# Altium PCB BMS Master 3.PcbDoc
Units mil, origin at the board's own origin, x right, y up, seen from the top; angles counter-clockwise.
Board outline 3612.09 x 1633.86 mil, 2 copper layers (Top Layer, Bottom Layer); 76 components, 60 nets, 314 pads, 49 vias.
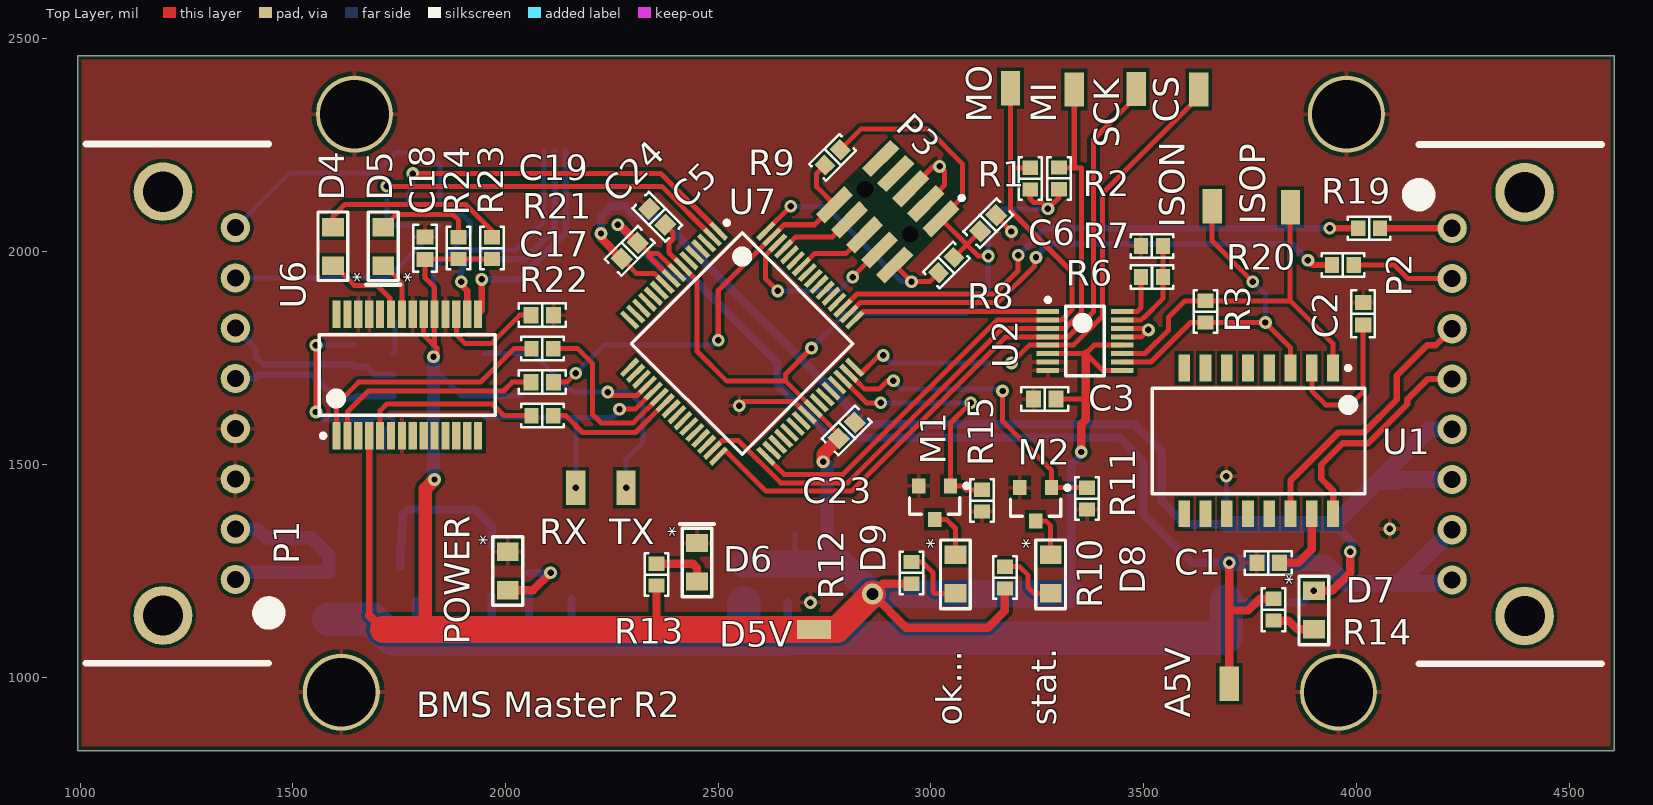
[diagram p0: Top Layer view]
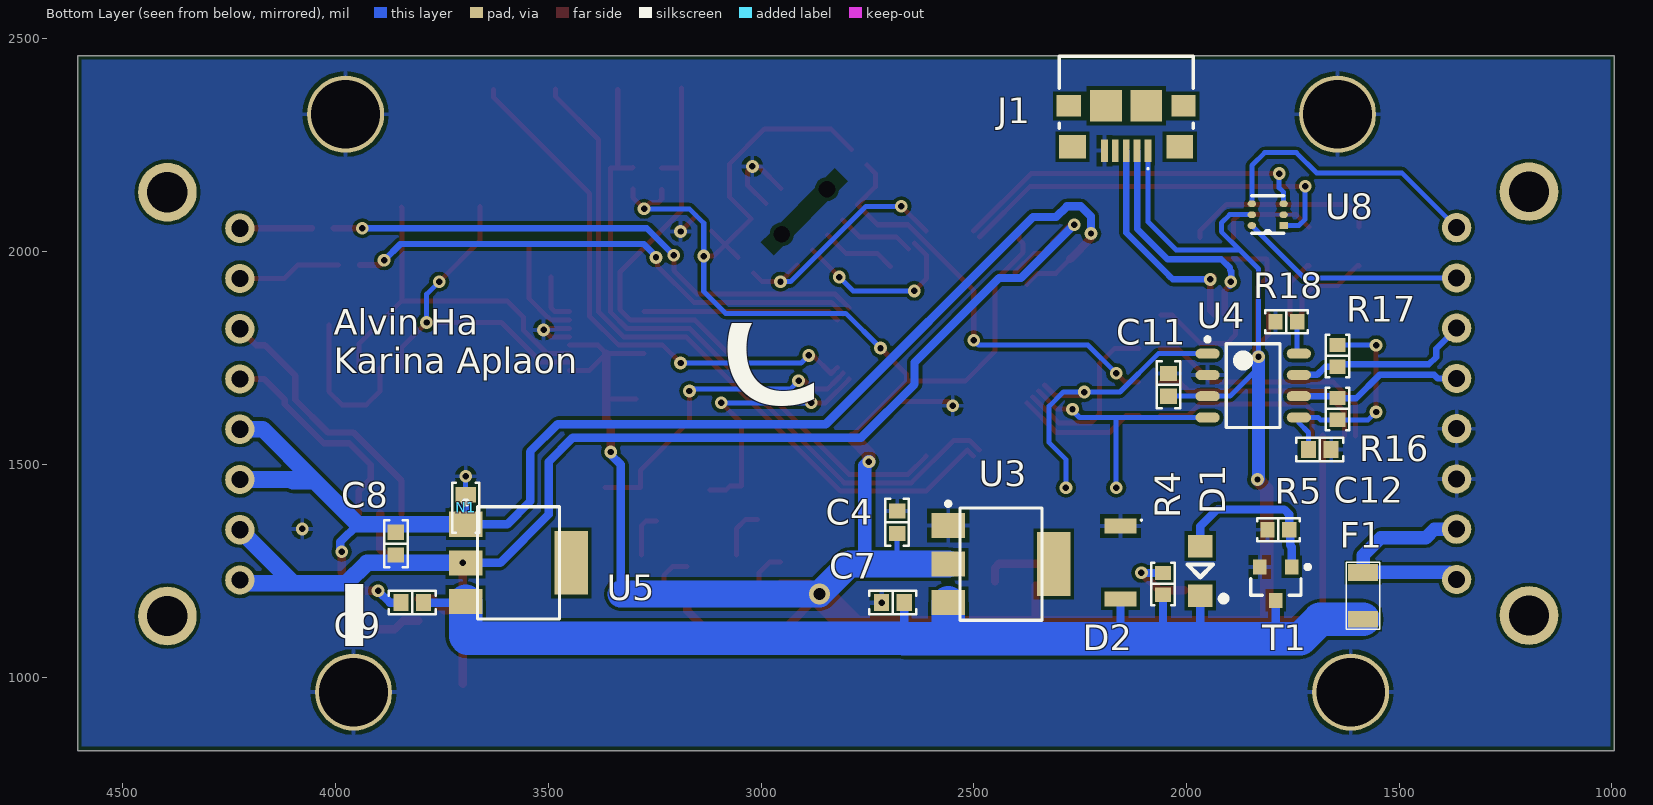
[diagram p1: Bottom Layer view, seen from below]
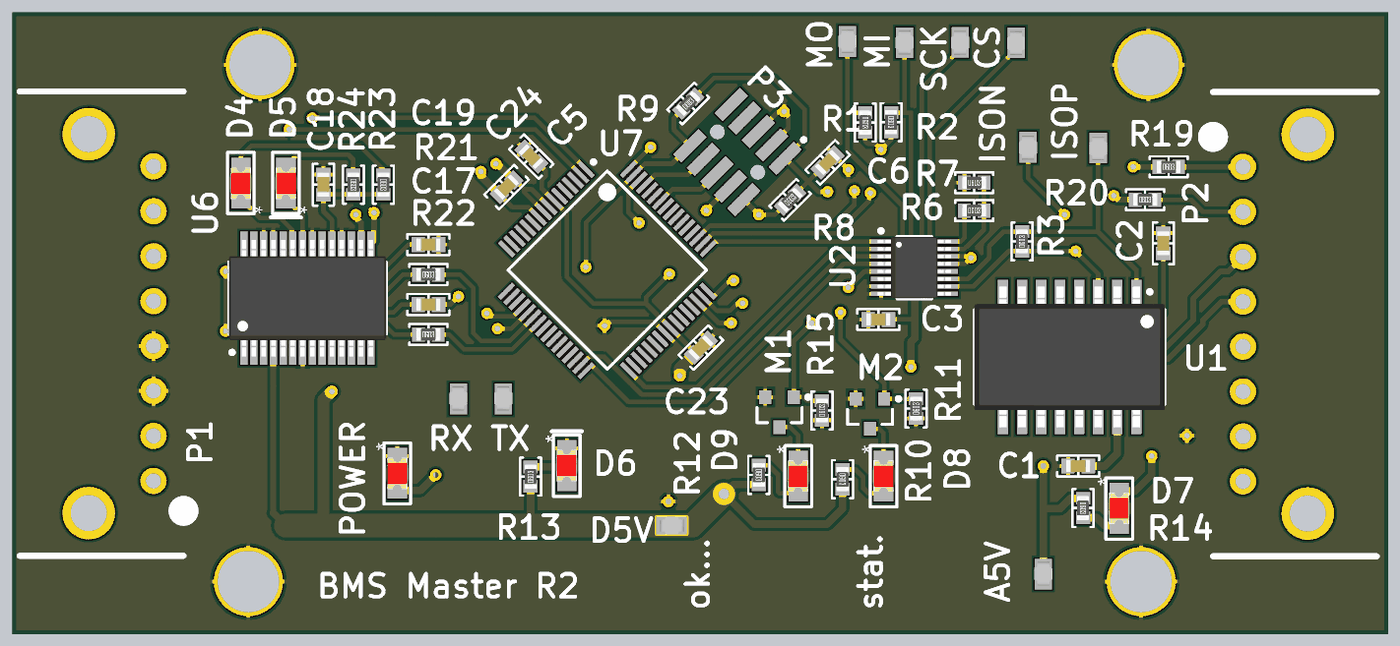
[diagram p2: 3D render of the assembled board from above, using the file's embedded part models]
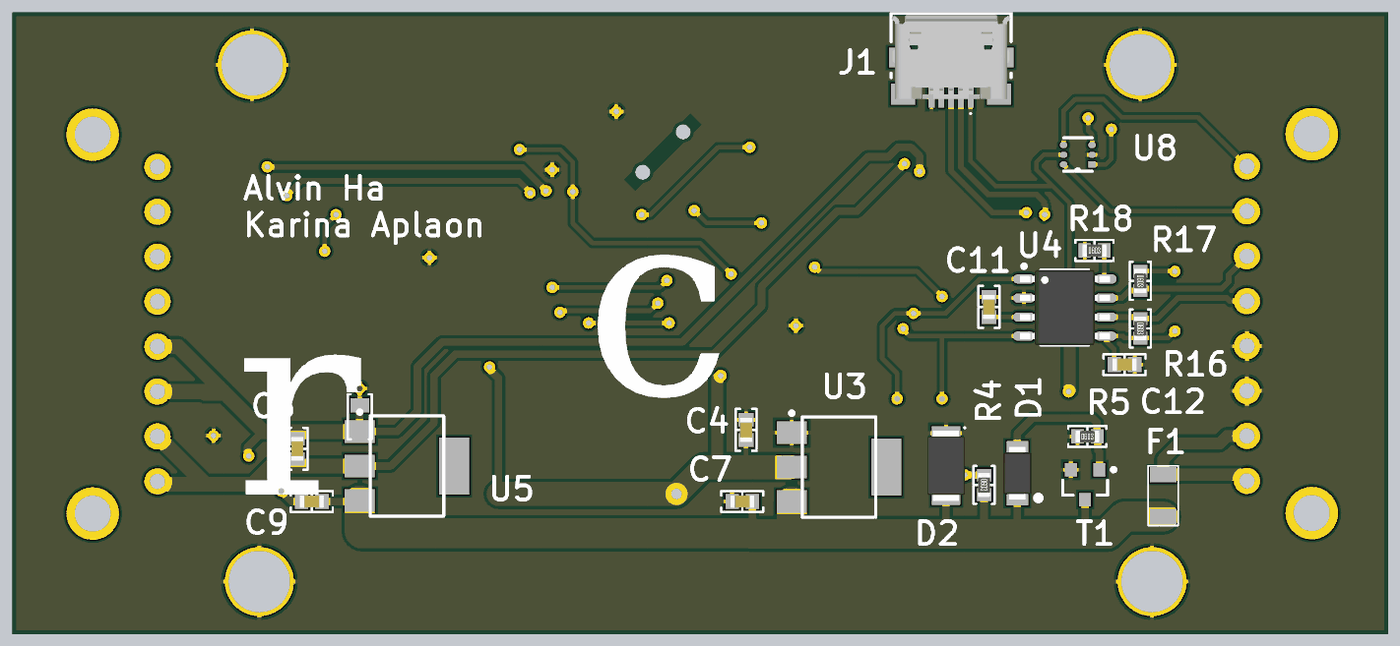
[diagram p3: 3D render of the assembled board from below, using the file's embedded part models]

## Layer stack, top to bottom
Top Solder: solder mask 0.4, Solder Resist, Dk 3.5
Top Layer: signal copper 1.4
Dielectric 1: dielectric 12.6, FR-4, Dk 4.8
Bottom Layer: signal copper 1.4
Bottom Solder: solder mask 0.4, Solder Resist, Dk 3.5

## Board outline
994.21,826.77 4606.3,826.77 4606.3,2460.63 994.21,2460.63

## Design rules (kind name [scope] priority, off if disabled: settings)
BoardOutlineClearance [All] p1: gap=10 ignorepadtopadclearanceinfootprint=FALSE
Clearance [All] p1: gap=8.03 ignorepadtopadclearanceinfootprint=FALSE except(6.3: SMDPad-SMDPad; 7.48: Arc-SMDPad Track-SMDPad; 7.87: Arc-Arc Arc-Track Track-Track)
DiffPairsRouting [All] p1: maxlimit=10 minlimit=10 mostfreqgap=10 toplayer_minwidth=15 toplayer_maxwidth=15 toplayer_prefwidth=15 bottomlayer_minwidth=15 bottomlayer_maxwidth=15 bottomlayer_prefwidth=15 maxuncoupledlength=500
HoleSize [All] p1: absolutevalues=TRUE maxlimit=196.85 minlimit=1 maxpercent=80.000 minpercent=20.000
MatchedLengths "Schematic Matched Net Lengths" [InNet('D_N')] p1: tolerance=10 checknetsindiffpair=FALSE checkdiffpairvsdiffpair=TRUE checkxsignals=TRUE checkothers=TRUE
PolygonConnect [All] p1: connectstyle=Relief reliefconductorwidth=10 reliefentries=4 polygonreliefangle="90 Angle" airgapwidth=10
RoomDefinition U_RVP_OVP_LC [InComponentClass('U_RVP_OVP_LC')] p1: confinementstyle=ConfineIn formatcopy=TRUE lockcomponents=FALSE outline 1675.24,1091.77 2260.24,1091.77 2260.24,1403.74 1675.24,1403.74
RoomDefinition U_CAN_Tranceiver [InComponentClass('U_CAN_Tranceiver')] p2: confinementstyle=ConfineIn formatcopy=TRUE lockcomponents=FALSE outline 1450,1480 2198.19,1480 2198.19,1945 1450,1945
RoutingVias [All] p1: holewidth=15.75 width=27.56 viastyle="Through Hole" minholewidth=15.75 minwidth=27.56 maxholewidth=28 maxwidth=50
SolderMaskExpansion [All] p1: expansion=4
Width [All] p1: maxlimit=393.7 minlimit=10 preferedwidth=11.81 minimp=50.000000 maximp=50.000000 favimp=50.000000
28 further rules are at their usual default settings.

## Classes and differential pairs
component class U_USB: C17 C18 C19 D4 D5 J1 R21 R22 R23 R24 U6
component class U_RVP_OVP_LC: D1 D2 POWER R4 R5 T1
component class U_Power: A5V C4 C7 C8 C9 D5V D6 D7 R13 R14 U3 U5
component class U_MCU_MKE185F512VLH16: C5 C6 C23 C24 CS D8 D9 M1 M2 MI MO P3 R8 R9 R10 R11 R12 R15 RX SCK TX U7
component class U_CAN_Tranceiver: C11 C12 R16 R17 R18 U4
component class "BMS Master": C1 C2 C3 F1 ISON ISOP N1 P1 P2 R1 R2 R3 R6 R7 R19 R20 U1 U2 U8
differential pair ISO: +ISO_P -ISO_N
differential pair D: +D_P -D_N
differential pair CAN: +CAN_P -CAN_N

## Components (designator, comment, footprint, x,y, rotation, side; value= is the part's Value field where it differs from the comment)
A5V "RCU-0C" RCU-0C 3700.79,984.25 r0 top
C1 "Capacitor MLCC 27pf 25V CAP 0603/1608" "CAP 0603/1608" 3792.32,1268.43 r0 top value=27pf
C2 "Capacitor MLCC 27pf 25V CAP 0603/1608" "CAP 0603/1608" 4015.75,1853.82 r270 top value=27pf
C3 "Capacitor MLCC 0.10uf 25V CAP 0603/1608" "CAP 0603/1608" 3267.72,1653.54 r180 top value=0.10uf
C4 "Capacitor MLCC 10uf 25V CAP 0603/1608" "CAP 0603/1608" 2680,1363.43 r270 bottom value=10uf
C5 "Capacitor MLCC 0.10uf 25V CAP 0603/1608" "CAP 0603/1608" 2356.52,2081.78 r315 top value=0.10uf
C6 "Capacitor MLCC 0.10uf 16V CAP 0603/1608" "CAP 0603/1608" 3134.61,2066.61 r225 top value=0.10uf
C7 "Capacitor MLCC 10uf 25V CAP 0603/1608" "CAP 0603/1608" 2690,1175 r180 bottom value=10uf
C8 "Capacitor MLCC 10uf 25V CAP 0603/1608" "CAP 0603/1608" 3858.27,1313.7 r270 bottom value=10uf
C9 "Capacitor MLCC 10uf 25V CAP 0603/1608" "CAP 0603/1608" 3820,1175 r180 bottom value=10uf
C11 "Capacitor MLCC 0.10uf 50V CAP 0603/1608" "CAP 0603/1608" 2042.4,1686.57 r270 bottom value=0.10uf
C12 "Capacitor MLCC 4700pf 50V CAP 0603/1608" "CAP 0603/1608" 1686.57,1535 r0 bottom value=4700pf
C17 "Capacitor MLCC 0.10uf 25V CAP 0603/1608" "CAP 0603/1608" 2086.61,1692.91 r0 top value=0.10uf
C18 "Capacitor MLCC 0.10uf 25V CAP 0603/1608" "CAP 0603/1608" 1811.02,2007.87 r270 top value=0.10uf
C19 "Capacitor MLCC 0.10uf 25V CAP 0603/1608" "CAP 0603/1608" 2086.61,1850.39 r180 top value=0.10uf
C23 "Capacitor MLCC 100pf 25V CAP 0603/1608" "CAP 0603/1608" 2801.94,1579.63 r225 top value=100pf
C24 "Capacitor MLCC 0.10uf 25V CAP 0603/1608" "CAP 0603/1608" 2291.79,2001.6 r45 top value=0.10uf
CS "RCU-0C" RCU-0C 3629.25,2380.91 r180 top
D1 "DDZ9701-7" SOD123F 1967.76,1249.37 r270 bottom value=14Vz
D2 "DIODE" SOD-128 2155.24,1269.37 r270 bottom value=5A
D4 "" 0805_LED 1594.39,2011.89 r270 top value=Green
D5 "" 0805_LED 1712.5,2011.89 r270 top value=Red
D5V "RCU-0C" RCU-0C 2725,1111.97 r270 top
D6 "LED" 0805_LED 2450,1269.72 r90 top value=Red
D7 "LED" 0805_LED 3900,1157.24 r90 top value=Green
D8 "LED" 0805_LED 3281.3,1241.91 r90 top value=Green
D9 "LED" 0805_LED 3057.39,1241.91 r90 top value=Green
F1 "2.2A" "PTC Fuse 1206/3216" 1585,1190.71 r90 bottom
ISON "RCU-0C" RCU-0C 3660.75,2106.3 r180 top value=CONN
ISOP "RCU-0C" RCU-0C 3845,2104.2 r180 top value=CONN
J1 "1981568-1" TECO-1981568-5_V 2141.73,2237.21 r0 bottom value=CONN
M1 "DMG2302UK-7" SOT23-3 3008.39,1410 r270 top value=N_Channel
M2 "DMG2302UK-7" SOT23-3 3245.87,1405.63 r270 top value=N_Channel
MI "RCU-0C" RCU-0C 3336.73,2380.91 r0 top (schematic designator MISO)
MO "RCU-0C" RCU-0C 3186.81,2383.86 r0 top (schematic designator MOSI)
N1 "Net_Tie" Net_Tie 3694.02,1397.82 r90 bottom net-tie
P1 "2-1445054-8" 2-1445054-8 1365.08,1229.33 r270 top
P2 "2-1445054-8" 2-1445054-8 4225,2054.8 r90 top
P3 "5103309-1" HDR2X5_SMT 2898.23,2093.54 r135 top value=CONN
POWER "LED" 0805_LED 2005.16,1249.37 r90 top value=Green (schematic designator POWER1)
R1 "Resistor 10k 0603 1/10W 5%" "RES 0603/1608" 3233.27,2171.26 r270 top value=10k
R2 "Resistor 10k 0603 1/10W 5%" "RES 0603/1608" 3301.3,2172.17 r270 top value=10k
R3 "Resistor 120 0603 1/10W 5%" "RES 0603/1608" 3645,1858.74 r90 top value=120
R4 "Resistor 470 0603 1/10W 5%" "RES 0603/1608" 2055.24,1218.78 r270 bottom value=470
R5 "Resistor 47k 0603 1/10W 5%" "RES 0603/1608" 1784.09,1346.14 r180 bottom value=47k
R6 "Resistor 1.5k 0603 1/10W 5%" "RES 0603/1608" 3519.43,1940 r0 top value=1.5k
R7 "Resistor 1.0k 0603 1/10W 5%" "RES 0603/1608" 3519.42,2013.15 r0 top value=1.0k
R8 "Resistor 10k 0603 1/10W 1%" "RES 0603/1608" 3036.18,1968.19 r45 top value=10k
R9 "Resistor 10k 0603 1/10W 5%" "RES 0603/1608" 2768.74,2221.26 r45 top value=10k
R10 "Resistor 470 0603 1/10W 5%" "RES 0603/1608" 3173.74,1233.74 r270 top value=470
R11 "Resistor 10k 0603 1/10W 1%" "RES 0603/1608" 3366.77,1419.41 r90 top value=10k
R12 "Resistor 470 0603 1/10W 5%" "RES 0603/1608" 2954.07,1245 r270 top value=470
R13 "Resistor 200 0603 1/10W 5%" "RES 0603/1608" 2355,1240.59 r90 top value=200
R14 "Resistor 200 0603 1/10W 5%" "RES 0603/1608" 3805,1158.15 r270 top value=200
R15 "Resistor 10k 0603 1/10W 1%" "RES 0603/1608" 3120,1414.41 r90 top value=10k
R16 "Resistor 62 0603 1/10W 5%" "RES 0603/1608" 1645,1630 r270 bottom value=62
R17 "Resistor 62 0603 1/10W 5%" "RES 0603/1608" 1645,1755 r270 bottom value=62
R18 "Resistor 100 0603 1/10W 10%" "RES 0603/1608" 1765.39,1835 r180 bottom value=100
R19 "Resistor 470 0603 1/10W 5%" "RES 0603/1608" 4029.84,2054.8 r0 top value=470
R20 "Resistor 470 0603 1/10W 5%" "RES 0603/1608" 3968.01,1968.5 r0 top value=470
R21 "Resistor 1.0k 0603 1/10W 5%" "RES 0603/1608" 2086.61,1771.65 r0 top value=1.0k
R22 "Resistor 1.0k 0603 1/10W 5%" "RES 0603/1608" 2086.61,1614.17 r0 top value=1.0k
R23 "Resistor 1.0k 0603 1/10W 5%" "RES 0603/1608" 1968.5,2007.87 r270 top value=1.0k
R24 "Resistor 1.0k 0603 1/10W 5%" "RES 0603/1608" 1889.76,2007.87 r270 top value=1.0k
RX "RCU-0C" RCU-0C 2165.35,1445 r0 top
SCK "RCU-0C" RCU-0C 3482.6,2381.89 r180 top
T1 "DMG2302UK-7" SOT23-3 1790,1219.37 r270 bottom value=N_Channel
TX "RCU-0C" RCU-0C 2283.46,1445 r0 top
U1 "HX1188NLT" HX1188NLT 3770,1555 r270 top
U2 "LTC6820" MSOP-16 3362.32,1789.84 r0 top
U3 "NCP1117ST50T3G" SOT-223-3 2435.98,1265.55 r180 bottom value="5V 1.0A"
U4 "MCP2561 CAN Transceiver" SOIC-8 1843.19,1685 r180 bottom value=CAN/UART
U5 "NCP1117ST50T3G" SOT-223-3 3570,1268.43 r180 bottom value="5V 1.0A"
U6 "FT232RL" SSOP-28 1769.24,1709.73 r90 top
U7 "" TQFP64 2556.26,1783.62 r315 top
U8 "comment" 6-TSSOP 1771.65,2061.02 r0 bottom value=None

## Footprints (in the part's own frame and the unit in brackets; to place one, negate y for a bottom-side part, rotate by r counter-clockwise, add the part's x,y. Pads: shape width x height; smd on the part's side, far side on the other; paste and mask are expansions set on the pad)
2-1445054-8 [mm] "8p through hole connector"
  round 1.75 hole 1.02: 1(0,0) 2(-3,0) 3(-6,0) 4(-9,0) 5(-12,0) 6(-15,0) 7(-18,0) 8(-21,0)
  round 3.5 hole 2.41: 9(-23.15,-4.32) 10(2.15,-4.32)
  silkscreen extent -26,-8.92 5,2.5, body extent -26,-8.92 5,0, height 4.37
6-TSSOP [mm]
  rect 0.5x0.4 smd: 1(0,0)
  oval 0.5x0.4 smd: 2(0,-0.65) 3(0,-1.3) 4(1.9,-1.3) 5(1.9,-0.65) 6(1.9,0)
  silkscreen extent 0,-1.78 1.9,0.45
0805_LED [mm]
  rect 1.1x1.3 smd: 1(-1.15,0) 2(1.15,0)
  silkscreen extent -2.06,-0.89 2.03,0.89, body extent -1.05,-0.67 1.05,0.68, height 0.9
"CAP 0603/1608" [mm] "Chip Capacitor, 2-Leads, Body 1.60x0.80mm, IPC Medium Density"
  rect 0.9x1 smd: 1(-0.675,0) 2(0.675,0)
  silkscreen extent -1.4,-0.7 1.4,0.7, body extent -0.8,-0.41 0.8,0.41, height 0.82
HDR2X5_SMT [mm] "Header, 10-Leads, Body 3.43x6.35mm, Pitch 1.27mm"
  rect 0.76x2.4 smd: 1(-2.54,-1.95) 2(-2.54,1.95) 3(-1.27,-1.95) 4(-1.27,1.95) 5(0,-1.95) 6(0,1.95) 7(1.27,-1.95) 8(1.27,1.95) 9(2.54,-1.95) 10(2.54,1.95)
  round 0 hole 1 unplated: MH1(-1.905,0) MH2(1.905,0)
  silkscreen extent -2.66,-3.82 -2.42,-3.58, body extent -3.18,-1.72 3.18,1.72, height 4.55
HX1188NLT [mm] "XFRMR MAGNETIC 1PORT 1:1 10/100"
  rect 1.6x0.7 smd: 1(-4.35,4.445) 2(-4.35,3.175) 3(-4.35,1.905) 4(-4.35,0.635) 5(-4.35,-0.635) 6(-4.35,-1.905) 7(-4.35,-3.175) 8(-4.35,-4.445) 9(4.35,-4.445) 10(4.35,-3.175) 11(4.35,-1.905) 12(4.35,-0.635) 13(4.35,0.635) 14(4.35,1.905) 15(4.35,3.175) 16(4.35,4.445)
  silkscreen extent -4.47,-6.35 3.15,6.35, body extent -4.7,-6.35 4.7,6.35, height 5.97
MSOP-16 [mm]
  rect 1.35x0.3 smd: 1(-2.225,1.75) 2(-2.225,1.25) 3(-2.225,0.75) 4(-2.225,0.25) 5(-2.225,-0.25) 6(-2.225,-0.75) 7(-2.225,-1.25) 8(-2.225,-1.75) 9(2.225,-1.75) 10(2.225,-1.25) 11(2.225,-0.75) 12(2.225,-0.25) 13(2.225,0.25) 14(2.225,0.75) 15(2.225,1.25) 16(2.225,1.75)
  silkscreen extent -2.35,-2.07 1.15,2.57, body extent -2.45,-2.05 2.45,2.05, height 1.1
Net_Tie [mm] "Chip Resistor, 2-Leads, Body 2.00x1.25mm, IPC High Density"
  rect 0.95x1.25 smd: 1(-0.775,0) 2(0.775,0)
  Top Layer lines w0.5: -0.381,0 0.381,0
  silkscreen extent -1.5,-0.8 1.5,0.8
"PTC Fuse 1206/3216" [mm]
  rect 1x1.8 smd: 1(-1.4,0) 2(1.4,0)
  silkscreen extent -2,-1 2,1, body extent -1.75,-1 1.75,1, height 1
RCU-0C [mm]
  rect 1.15x2.05 smd: 1(0,0)
  body extent -0.6,-0.78 0.6,0.82, height 1.16
"RES 0603/1608" [mm] "Chip Resistor, 2-Leads, Body 1.60x0.80mm, IPC Medium Density"
  rect 0.85x0.95 smd: 1(-0.65,0) 2(0.65,0)
  silkscreen extent -1.27,-0.7 1.27,0.7, body extent -0.8,-0.4 0.8,0.4, height 0.45
SOD123F [mm] "SODFL, 2-Leads, Body 1.80x3.50mm, IPC Low Density"
  rect 1.35x1.45 smd: 1(-1.475,0) 2(1.475,0)
  silkscreen extent -0.38,-0.76 1.75,1.5, body extent -1.75,-0.95 1.75,0.95, height 1.15
SOD-128 [mm] "SOD-128, 2-Leads, Body 2.40x4.70mm, IPC Medium Density"
  rect 0.9x1.9 smd: 1(-2.175,0) 2(2.175,0)
  silkscreen extent -2.57,1.2 -2.48,1.3, body extent -2.35,-1.25 2.35,1.25, height 0.85
SOIC-8 [mm] "SOIC, 8-Leads, Body 4.90x3.90mm, Pitch 1.27mm, IPC Medium Density"
  oval 1.45x0.6 smd: 1(-2.725,1.905) 2(-2.725,0.635) 3(-2.725,-0.635) 4(-2.725,-1.905) 5(2.725,-1.905) 6(2.725,-0.635) 7(2.725,0.635) 8(2.725,1.905)
  silkscreen extent -2.85,-2.5 1.6,2.88, body extent -3,-2.5 3,2.5, height 1.75
SOT23-3 [mm] "SOT23, 3-Leads, Body 2.92x2.37mm, Pitch 0.95mm, IPC Medium Density, NUP2105L"
  rect 0.9x0.8 smd: 1(-1,0.95) 2(-1,-0.95) 3(1,0)
  silkscreen extent -1.12,-1.5 0.7,2.03, body extent -0.7,-1.52 0.7,1.52, height 1.11
SOT-223-3 [mm] "SOT223127P600-8N, NCP1117STAT3G, MMBT4403-7-F"
  rect 2x1.5 smd: 1(-3.15,2.3) 2(-3.15,0) 3(-3.15,-2.3)
  rect 2x3.8 smd: THM(3.15,0)
  silkscreen extent -3.27,-3.35 2.45,3.72, body extent -1.85,-3.35 1.85,3.35, height 1.8
SSOP-28 [mm] "hi"
  rect 1.65x0.49 smd: 1(-3.625,4.225) 2(-3.625,3.575) 3(-3.625,2.925) 4(-3.625,2.275) 5(-3.625,1.625) 6(-3.625,0.975) 7(-3.625,0.325) 8(-3.625,-0.325) 9(-3.625,-0.975) 10(-3.625,-1.625) 11(-3.625,-2.275) 12(-3.625,-2.925) 13(-3.625,-3.575) 14(-3.625,-4.225) 15(3.625,-4.225) 16(3.625,-3.575) 17(3.625,-2.925) 18(3.625,-2.275) 19(3.625,-1.625) 20(3.625,-0.975) 21(3.625,-0.325) 22(3.625,0.325) 23(3.625,0.975) 24(3.625,1.625) 25(3.625,2.275) 26(3.625,2.925) 27(3.625,3.575) 28(3.625,4.225)
  silkscreen extent -3.75,-5.25 2.4,5.25, body extent -3.9,-5.25 3.9,5.25, height 2
TECO-1981568-5_V [mm] "SMD, 5-Leads, Body 8x5.9mm, Pitch 0.65mm"
  rect 0.4x1.35 smd: 1(-1.3,0) 2(-0.65,0) 3(0,0) 4(0.65,0) 5(1.3,0)
  rect 1.6x1.4 smd: 6(-3.2,-0.225) 7(3.2,-0.225)
  rect 1.45x1.3 smd: 8(-3.425,-2.675) 9(3.425,-2.675)
  rect 1.9x1.9 smd: 10(-1.2,-2.675) 11(1.2,-2.675)
  silkscreen extent -4,-5.62 4,1.12, body extent -4,-5.5 4,0.1, height 2.79
TQFP64 [mm] "TSQFP, 64-Leads, Body 10.00x10.00mm, Pitch 0.50mm, IPC Medium Density, MKE18F512VLH16"
  rect 1.35x0.3 smd: 1(-5.75,3.75) 2(-5.75,3.25) 3(-5.75,2.75) 4(-5.75,2.25) 5(-5.75,1.75) 6(-5.75,1.25) 7(-5.75,0.75) 8(-5.75,0.25) 9(-5.75,-0.25) 10(-5.75,-0.75) 11(-5.75,-1.25) 12(-5.75,-1.75) 13(-5.75,-2.25) 14(-5.75,-2.75) 15(-5.75,-3.25) 16(-5.75,-3.75) 33(5.75,-3.75) 34(5.75,-3.25) 35(5.75,-2.75) 36(5.75,-2.25) 37(5.75,-1.75) 38(5.75,-1.25) 39(5.75,-0.75) 40(5.75,-0.25) 41(5.75,0.25) 42(5.75,0.75) 43(5.75,1.25) 44(5.75,1.75) 45(5.75,2.25) 46(5.75,2.75) 47(5.75,3.25) 48(5.75,3.75)
  rect 0.3x1.35 smd: 17(-3.75,-5.75) 18(-3.25,-5.75) 19(-2.75,-5.75) 20(-2.25,-5.75) 21(-1.75,-5.75) 22(-1.25,-5.75) 23(-0.75,-5.75) 24(-0.25,-5.75) 25(0.25,-5.75) 26(0.75,-5.75) 27(1.25,-5.75) 28(1.75,-5.75) 29(2.25,-5.75) 30(2.75,-5.75) 31(3.25,-5.75) 32(3.75,-5.75) 49(3.75,5.75) 50(3.25,5.75) 51(2.75,5.75) 52(2.25,5.75) 53(1.75,5.75) 54(1.25,5.75) 55(0.75,5.75) 56(0.25,5.75) 57(-0.25,5.75) 58(-0.75,5.75) 59(-1.25,5.75) 60(-1.75,5.75) 61(-2.25,5.75) 62(-2.75,5.75) 63(-3.25,5.75) 64(-3.75,5.75)
  silkscreen extent -5.87,-4.68 4.68,4.68, body extent -5,-5 5,5, height 1.6

## Part data
A5V CS D5V MI MO RX SCK TX: library part 5, Manufacturer_id=1, Package=0603, ComponentLink1Description=Datasheet, ComponentLink1URL=https://www.te.com/commerce/DocumentDelivery/DDEController?Action=srchrtrv&DocNm=1773266&DocType=DS&DocLang=English, Drawer_id=1, idTable=5, Link=https://www.digikey.com/product-detail/en/te-connectivity-amp-connectors/RCU-0C/A106145CT-ND/3477802, MfrPartNo=RCU-0C, Name=RCU-0C_Test_Point
C1 C2: library part 515, Dielectric=Ceramic, Manufacturer_id=1, Package="CAP 0603/1608", Voltage_Rating=25V, Created_By="Nick Mah", Created_Date=10/20/2018, Drawer_id=1, idCapacitor=515, Name="Cap_27pf_25V_CAP 0603/1608"
C3 C5 C17 C18 C19 C24: library part 583, Dielectric=Ceramic, Manufacturer_id=1, Package="CAP 0603/1608", Voltage_Rating=25V, Created_By="Nick Mah", Created_Date=10/20/2018, Drawer_id=1, idCapacitor=583, Name="Cap_0.10uf_25V_CAP 0603/1608"
C4 C7 C8 C9: library part 595, Dielectric=Ceramic, Manufacturer_id=1, Package="CAP 0603/1608", Voltage_Rating=25V, Created_By="Nick Mah", Created_Date=10/20/2018, Drawer_id=1, idCapacitor=595, Name="Cap_10uf_25V_CAP 0603/1608"
C6: library part 223, Dielectric=Ceramic, Manufacturer_id=1, Package="CAP 0603/1608", Voltage_Rating=16V, Created_By="Nick Mah", Created_Date=10/20/2018, Drawer_id=1, idCapacitor=223, Name="Cap_0.10uf_16V_CAP 0603/1608"
C11: library part 943, Dielectric=Ceramic, Manufacturer_id=1, Package="CAP 0603/1608", Voltage_Rating=50V, Created_By="Nick Mah", Created_Date=10/20/2018, Drawer_id=1, idCapacitor=943, Name="Cap_0.10uf_50V_CAP 0603/1608"
C12: library part 929, Dielectric=Ceramic, Manufacturer_id=1, Package="CAP 0603/1608", Voltage_Rating=50V, Created_By="Nick Mah", Created_Date=10/20/2018, Drawer_id=1, idCapacitor=929, Name="Cap_4700pf_50V_CAP 0603/1608"
C23: library part 529, Dielectric=Ceramic, Manufacturer_id=1, Package="CAP 0603/1608", Voltage_Rating=25V, Created_By="Nick Mah", Created_Date=10/20/2018, Drawer_id=1, idCapacitor=529, Name="Cap_100pf_25V_CAP 0603/1608"
D1: library part 10, "Zener Diode 14V 500mW ±5% Surface Mount SOD-123", Manufacturer_id=8, Package=SOD-123, Power=500mW, Supplier1PartNo=DDZ9701-7DICT-ND, ComponentLink1Description=Datasheet, ComponentLink1URL=https://www.diodes.com/assets/Datasheets/ds30410.pdf, Drawer_id=1, idDiode=10, Link=https://www.digikey.com/product-detail/en/diodes-incorporated/DDZ9701-7/DDZ9701-7DICT-ND/3877402, MfrPartNo=DDZ9701-7, Name=DDZ9701, Num_Circuits=1, Supplier1=Digi-Key, Type=Zener
D2: library part 12, "DIODE SCHOTTKY 30V 5A TMINIP2", Manufacturer_id=1, MfrPartNo=DB2431200L, Package=SOD-128, Power=30V, Supplier1PartNo=DB2431200LCT-ND, ComponentLink1Description=Datasheet, ComponentLink1URL=https://industrial.panasonic.com/content/data/SC/ds/ds4/DB2431200L_E.pdf, Drawer_id=1, Ic=5A, idDiode=12, Link=https://www.digikey.com/product-detail/en/panasonic-electronic-components/DB2431200L/DB2431200LCT-ND/3884430, Name=DB2431200L, Num_Circuits=1, Supplier1=Digi-Key, Type=Schottky
D4 D7 D8 D9 POWER: library part 2, Manufacturer_id=1, Package=0805, Brightness=7mcd, Drawer_id=1, Id=20mA, idLED=2, Link=https://www.digikey.com/product-detail/en/visual-communications-company-vcc/CMD17-21VGD-TR8/L62505CT-ND/254936, Name=CMD17_0805_GREEN, Vf=2.1V
D5 D6: library part 1, Package=0805, Drawer_id=1, idLED=1, Manufacturer_id=1, Name=LED_0805_RED, Vf=0.7V
F1: library part 8, "Fuse", Manufacturer_id=1, MfrPartNo=1206L110/12SLYR, Drawer_id=1, I_hold=1.1A, I_max=50A, I_trip=2.2A, idFuse=8, LatestRevisionDate=17-Jul-2002, LatestRevisionNote="Re-released for DXP Platform.", Link=https://www.digikey.com/product-detail/en/littelfuse-inc/1206L110-12SLYR/F5764CT-ND/3593809, Name=Resettable, PackageDescription="Thru-Hole; 2 Leads", PackageReference=PIN-W2/E2.8, Pd_Typ=.8W, Published=8-Jun-2000, Publisher="Altium Limited", V_max=12V
ISON ISOP: library part 14, "Test point", Manufacturer_id=1, Supplier1PartNo=None, ComponentLink1Description=Null, ComponentLink1URL=Null, Created_By=Graydon, Created_Date=11/10/2018, Drawer_id=1, idConn=14, Link=https://www.digikey.com/product-detail/en/te-connectivity-amp-connectors/RCU-0C/A106145CT-ND/3477802, MfrPartNo=RCU-0C, Name=RCU-0C, Num_Contacts=1, Num_Rows=1, Package=RCU-0C, Supplier1=None, Updated_By=Null
J1: library part 5, "USB Micro Type B", Manufacturer_id=1, ComponentLink1Description=Datasheet, Created_By=Aiku, Created_Date=10/20/2018, Drawer_id=1, idConn=5, Link=https://www.mouser.com/ProductDetail/TE-Connectivity-AMP/1981568-1?qs=sGAEpiMZZMulM8LPOQ%252bykzEIUPbUCiSfqsfxH3Oq%252bYo%3d, MfrPartNo=1981568-1, Name="TE USB Micro", Num_Contacts=5, Supplier1=TE
M1 M2 T1: library part 6, "MOSFET N-CHANNEL 30V 5A SOT23", Manufacturer_id=1, Package=SOT-23, Created_By=Angel, Drawer_id=1, Id=2.8A, idFETs=6, Link=https://www.digikey.com/product-detail/en/diodes-incorporated/DMG2302UK-7/DMG2302UK-7DICT-ND/6010163, MfrPartNo=DMG2302UK-7, Name=DMG2302UK-7, Num_Circuits=1, Rds_On=90mOhm, Supplier1=Digi-Key, Vdss=20V, Vgs(Max)=1V, Vgs(typ)=800mV
N1 U7: library part 1, Drawer_id=1, Manufacturer_id=1
  N1: idFuse=3, idShunt=1, Name="Net Tie"
  U7: idMCU=1, Name="MKE18F512VLH16 MCU"
P1 P2: library part 12, "1x8 connector", Manufacturer_id=5, Supplier1PartNo=2-1445054-8-ND, ComponentLink1Description=Datasheet, Created_By=Graydon, Created_Date=11/10/2018, Drawer_id=1, idConn=12, Link=https://www.digikey.com/product-detail/en/te-connectivity-amp-connectors/2-1445054-8/2-1445054-8-ND/1890093, MfrPartNo=2-1445054-8, Name="Micro MATE-N-LOK 1x8", Num_Contacts=8, Num_Rows=1, Supplier1=Digi-Key
P3: library part 4, "2 row connector", Manufacturer_id=1, Voltage_Rating=None, ComponentLink1Description=Datasheet, Created_By=Aiku, Drawer_id=1, idConn=4, Link=https://www.digikey.com/product-detail/en/5103309-1/A33160-ND/1114898?utm_campaign=buynow&WT.z_cid=ref_octopart_dkc_buynow&utm_medium=aggregator&curr=usd&site=us&utm_source=octopart, MfrPartNo=5103309-1, Name=CONN_TE_2X5POS, Num_Contacts=10, Num_Rows=2, Pitch=2.54mm
R1 R2 R9: library part 1393, Manufacturer_id=1, Package=0603, Power=1/10W, Tolerance=5%, ComponentLink1Description=Datasheet, Created_By="Nick Mah", Created_Date=2018-10-20, Drawer_id=1, idResistor=1393, Name=Res_10k_0603_1/10W_5%, Supplier 1=Digi-Key
R3: library part 1347, Manufacturer_id=1, Package=0603, Power=1/10W, Tolerance=5%, ComponentLink1Description=Datasheet, Created_By="Nick Mah", Created_Date=2018-10-20, Drawer_id=1, idResistor=1347, Name=Res_120_0603_1/10W_5%, Supplier 1=Digi-Key
R4 R10 R12 R19 R20: library part 1361, Manufacturer_id=1, Package=0603, Power=1/10W, Tolerance=5%, ComponentLink1Description=Datasheet, Created_By="Nick Mah", Created_Date=2018-10-20, Drawer_id=1, idResistor=1361, Name=Res_470_0603_1/10W_5%, Supplier 1=Digi-Key
R5: library part 1409, Manufacturer_id=1, Package=0603, Power=1/10W, Tolerance=5%, ComponentLink1Description=Datasheet, Created_By="Nick Mah", Created_Date=2018-10-20, Drawer_id=1, idResistor=1409, Name=Res_47k_0603_1/10W_5%, Supplier 1=Digi-Key
R6: library part 1373, Manufacturer_id=1, Package=0603, Power=1/10W, Tolerance=5%, ComponentLink1Description=Datasheet, Created_By="Nick Mah", Created_Date=2018-10-20, Drawer_id=1, idResistor=1373, Name=Res_1.5k_0603_1/10W_5%, Supplier 1=Digi-Key
R7 R21 R22 R23 R24: library part 1369, Manufacturer_id=1, Package=0603, Power=1/10W, Tolerance=5%, ComponentLink1Description=Datasheet, Created_By="Nick Mah", Created_Date=2018-10-20, Drawer_id=1, idResistor=1369, Name=Res_1.0k_0603_1/10W_5%, Supplier 1=Digi-Key
R8 R11 R15: library part 313, Manufacturer_id=1, Package=0603, Power=1/10W, Tolerance=1%, ComponentLink1Description=Datasheet, Created_By="Nick Mah", Created_Date=2018-10-20, Drawer_id=1, idResistor=313, Name=Res_10k_0603_1/10W_1%, Supplier 1=Digi-Key
R13 R14: library part 1352, Manufacturer_id=1, Package=0603, Power=1/10W, Tolerance=5%, ComponentLink1Description=Datasheet, Created_By="Nick Mah", Created_Date=2018-10-20, Drawer_id=1, idResistor=1352, Name=Res_200_0603_1/10W_5%, Supplier 1=Digi-Key
R16 R17: library part 1340, Manufacturer_id=1, Package=0603, Power=1/10W, Tolerance=5%, ComponentLink1Description=Datasheet, Created_By="Nick Mah", Created_Date=2018-10-20, Drawer_id=1, idResistor=1340, Name=Res_62_0603_1/10W_5%, Supplier 1=Digi-Key
R18: library part 2293, Manufacturer_id=1, Package=0603, Power=1/10W, Tolerance=10%, ComponentLink1Description=Datasheet, Created_By="Nick Mah", Created_Date=2018-10-20, Drawer_id=1, idResistor=2293, Name=Res_100_0603_1/10W_10%, Supplier 1=Digi-Key
U1: library part 8, Manufacturer_id=1, Created_By=Angel, Drawer_id=1, idFuse=3, idIC_Interface=8, Link=https://www.digikey.com/product-detail/en/pulse-electronics-network/HX1188NLT/553-1536-1-ND/3151809?utm_adgroup=Transformers&slid=&gclid=CjwKCAiAhp_jBRAxEiwAXbniXRrdDycXKcdMEppGgTacWMJf80VG2GQDdYxlb9yRzxEZsto0mBbjlhoCtm4QAvD_BwE, MfrPartNo=HX1188NLT, Name=HX1188NLT, Num_Circuits=2, Package=HX1188NLT, Type="Magnetic Isolation"
U2: library part 7, "soSPI Isolated / Communications Interface", Manufacturer_id=1, Package=MSOP-16, Created_By=Angel, Drawer_id=1, idFuse=3, idIC_Interface=7, Link=https://www.mouser.com/ProductDetail/Analog-Devices/LTC6820IMSPBF?qs=sGAEpiMZZMvi6wO7nhr1LyTLeBC7dAWQpR44bZH0zYY%3d, MfrPartNo=LTC6820, Name=LTC6820, Num_Circuits=1, Protocol=isoSPI, Type=bidirectional, Vin(Max)=5.5V, Vin(Min)=2.7V
U3 U5: library part 16, "Linear Voltage Regulator IC Positive Fixed 1 Output 5V 1A SOT-223", Current_Rating=1A, Dropout_Voltage="1.2V @ 800mA", Manufacturer_id=1, Package=SOT-223-3, ComponentLink1Description=Datasheet, ComponentLink1URL=https://www.onsemi.com/pub/Collateral/NCP1117-D.PDF, Created_By="Angel Delgado", Drawer_id=1, idPMIC_Lin=16, Link=https://www.digikey.com/product-detail/en/on-semiconductor/NCP1117ST50T3G/NCP1117ST50T3GOSCT-ND/1967217, MfrPartNo=NCP1117ST50T3G, Name="5V 1A LDO", Num_Outputs=1, Output_Config="5V Fixed", Vin(Max)=20V, Vout(Max)=5.05, Vout(Min)=4.95, Vout_Type=Fixed
U4: library part 5, Manufacturer_id=1, MfrPartNo=MCP2561, Package=SOIC-8, Created_By="Angel Delgado", Data_Rate=1Mbps, Drawer_id=1, idIC_Interface=5, Link=https://www.digikey.com/product-detail/en/microchip-technology/MCP2561T-E-SN/MCP2561T-E-SNCT-ND/5148846, Name="CAN Transceiver", Num_Circuits=1, Protocol=CAN, Type=Transceiver, Vin(Max)=5.5V, Vin(Min)=4.5V
U6: library part 3, Manufacturer_id=1, Created_By=Kyle, Drawer_id=1, idIC_Interface=3, Link=https://www.digikey.com/product-detail/en/ftdi-future-technology-devices-international-ltd/FT232RL-REEL/768-1007-1-ND/1836402, MfrPartNo=FT232RL, Name="USB FTDI", Protocol=UART, Vin(Max)=5.25, Vin(Min)=3.3
U8: library part 10, "Buffer dual high speed", Manufacturer_id=1, MfrPartNo=NC7WZ07P6X, Package=6-TSSOP, Supplier1PartNo=NC7WZ07P6XCT-ND, ComponentLink1Description=Digikey, ComponentLink1URL=https://www.digikey.com/product-detail/en/on-semiconductor/NC7WZ07P6X/NC7WZ07P6XCT-ND/965702, Created_By=gray, Created_Date=3/6/2019, Data_Rate=2.3ns, Drawer_id=1, idIC_Interface=10, Link=https://www.digikey.com/product-detail/en/on-semiconductor/NC7WZ07P6X/NC7WZ07P6XCT-ND/965702, Name="Buffer 2x", Num_Circuits=2, Protocol=None, Supplier1=Digikey, Type=Buffer, Updated_By=Null, Vin(Max)=5.5V, Vin(Min)=1.65V

## Free pads (board coordinates)
  round 181.1 hole 161.42: 3(3976.38,2322.83) 4(1614.17,964.57) 4(1645,2322.83) 4(3957.65,964.57)

## Via types
v1: diameter 30, hole 15, Top Layer to Bottom Layer, 48 vias
v2: diameter 50, hole 28, Top Layer to Bottom Layer, 1 vias

## Nets (pads, with @x,y where several pads share a name; then routed paths per layer and width w, separated by ;. In a path a pad name is that pad's centre, name@x,y a point inside that pad or via, vN(x,y) a via of type N, cw(c..) or ccw(c..) an arc to the next point about the centre after c; other vN are vias at no path point)
+12V: C7.2 C9.2 D1.2 D2.2 F1.1 R4.2 T1.3 U3.3 U5.3 | length 2876.1
  Bottom Layer w19.68: 1790,1090 T1.3 ; D1.2 1967.76,1092.24 1970,1090 ; 2055,1090 2055.24,1090.24 R4.2 ; 2155,1090 2155.24,1090.24 D2.2 ; C7.2 2663.43,1091.57 2665,1090 ; U5.3 3696.89,1175 C9.2
  Bottom Layer w39.37: 2560,1095 2565,1090
  Bottom Layer w78.74: F1.1 1686.69,1135.59 1732.28,1090 1790,1090 1970,1090 2055,1090 2155,1090 2565,1090 2665,1090 ; 2560,1095 U3.3 ; 2663.43,1091.57 3690,1091.57 3694.02,1095.59 U5.3
+12V_prefsd: F1.2 P1.1 P1.2 | length 512.3
  Bottom Layer w31.5: P1.1 1381.57,1245.83 F1.2 1585,1286.06 1543.31,1327.76 1437.01,1327.76 1417.32,1347.44 P1.2
ADC0_SE3: R20.1 U7.50 | length 1235.7
  Top Layer w11.81: U7.50 U7.50@2821.42,1867.83 ; U7.50@2821.43,1867.83 2834.1,1880.51 3158.01,1880.51 3243.73,1966.23 3243.73,1983.19 v1(3246.82,1986.28)
  Top Layer w15: v1(3885.83,1979.33) 3896.65,1968.5 R20.1
  Bottom Layer w15: v1(3246.82,1986.28) 3246.82,1989.11 3275.4,2017.69 3847.47,2017.69 v1(3885.83,1979.33)
ADC0_SE13: U7.2 U8.1 | length 949.7
  Top Layer w11.81: v1(1721.02,2153.63) 1721.37,2153.28 2367.55,2153.28 U7.2
  Bottom Layer w11.81: v1(1721.02,2153.63) 1721.02,2075.87 1735.87,2061.02 U8.1
ADC0_SE15: U7.1 U8.3 | length 850.1
  Top Layer w11.81: v1(1782.03,2183.19) 1782.38,2183.53 2365.14,2183.53 U7.1
  Bottom Layer w11.81: U8.3 1771.65,2139.45 1782.03,2149.83 v1(1782.03,2183.19)
ADC1_SE3: R19.1 U7.51 | length 1310.3
  Top Layer w11.81: U7.51 2825.95,1900.2 3149.85,1900.2 3205,1955.34 v1(3205,1991.56)
  Top Layer w15: v1(3937.01,2054.8) R19.1
  Bottom Layer w15: v1(3205,1991.56) 3268.24,2054.8 v1(3937.01,2054.8)
AGND: C8.1 C9.1 C24.1 D7.2 N1.1 P2.5 P2.6 U5.1 U7.10 | length 3205.6
  Top Layer w11.81: C24.1 2306.99,1948.82 2349.3,1948.82 U7.10
  Top Layer w19.68: v1(2224.41,2042.32) 2224.41,2031.4 C24.1 ; v1(3900,1202.52) 3941.97,1202.52 3985.55,1246.1 v1(3985.55,1294.65)
  Bottom Layer w19.68: v1(2224.41,2042.32) 2224.41,2082.56 2248.15,2106.3 2281.29,2106.3 2306.41,2081.18 2360.84,2081.18 2847.84,1594.17 3478,1594.17 3542.58,1529.6 3542.58,1412.74 3596.34,1358.98 U5.1 ; C9.1 3872.48,1175 v1(3900,1202.52) ; 3947.6,1358.98 3988.5,1318.08 3988.5,1299.21 3985.55,1296.26 v1(3985.55,1294.65)
  Bottom Layer w39.37: U5.1 3947.6,1358.98 4048.63,1460 ; P2.6 4104.25,1464.25 4100,1460 4048.63,1460 ; P2.5 4170.99,1582.36 4048.63,1460
AVCC_5V: A5V.1 C8.2 C24.2 P2.7 P2.8 R14.1 U5.2 U7.8 U7.9 | length 3259.3
  Top Layer w11.81: C24.2 2313.21,2020.39 2337.73,1995.88 ; U7.9 2337.73,1988.24 2337.73,1995.88 ; U7.8 2357.92,1995.88 2337.73,1995.88
  Top Layer w19.68: v1(2263.95,2062.99) 2267.98,2062.99 C24.2 ; A5V.1 3700.79,1156.3 ; v1(3700.79,1268.43) 3700.79,1156.3 ; R14.1 3772.64,1183.74 3745.2,1156.3 3700.79,1156.3
  Bottom Layer w19.68: v1(2263.95,2062.99) 2389.05,1937.89 2440.78,1937.89 2639.25,1739.42 2639.25,1687.69 2764.35,1562.59 3442.41,1562.59 3499.25,1505.75 3499.25,1382.09 3612.91,1268.43 U5.2
  Bottom Layer w39.37: U5.2 v1(3700.79,1268.43) 3926.57,1268.43 3974.41,1220.59 4099.45,1220.59 ; P2.8 4217.56,1220.59 4099.45,1220.59 ; P2.7 4099.45,1220.59
CAN_N: P1.5 R16.1 U4.6 | length 398.6
  Bottom Layer w15: P1.5 1409.09,1701.77 1417.32,1710 1546.4,1710 1600.81,1655.59 R16.1 1649.41,1660 U4.6
CAN_P: P1.6 R17.2 U4.7 | length 427.9
  Bottom Layer w15: P1.6 1413.31,1771.65 1413.31,1751.97 1430.28,1735 1639.41,1735 R17.2 1673.74,1729.41 1693.15,1710 U4.7
CAN_RX: RX.1 U4.4 U7.21 | length 589.5
  Top Layer w11.81: v1(2267.98,1629.53) 2304.73,1629.53 U7.21
  Bottom Layer w11.81: U4.4 2165.35,1610 ; v1(2165.35,1445) 2165.35,1610 ; v1(2267.98,1629.53) 2267.98,1626.68 2251.3,1610 2165.35,1610
CAN_TX: TX.1 U4.1 U7.20 | length 738.2
  Top Layer w11.81: v1(2240.22,1669.76) 2248.48,1661.5 2308.86,1661.5 U7.20
  Bottom Layer w11.81: U4.1 2066.09,1760 2156.33,1669.76 v1(2240.22,1669.76) 2289.47,1669.76 2322.78,1636.44 2322.78,1550.98 2283.46,1511.66 v1(2283.46,1445)
cs: CS.1 U2.5 U7.48 | length 1285.4
  Top Layer w11.81: U7.48 2835.34,1713.33 2874.83,1752.81 2884.7,1752.81 v1(2887.79,1755.91) ; v1(3188.97,1737.99) 3230.98,1780 3254.05,1780 3334.69,1780 3402.91,1848.22 3402.91,2136.85 3629.25,2363.19 CS.1
  Bottom Layer w11.81: v1(2887.79,1755.91) 2905.71,1737.99 v1(3188.97,1737.99)
D_N: J1.2 U6.16 | length 576.9
  Top Layer w15: v1(1896.22,1929.18) 1896.22,1921.27 1909.98,1907.48 U6.16
  Bottom Layer w15: v1(1896.22,1929.18) 1896.22,1921.27 1897.63,1919.83 1897.63,1925.33 1894.67,1928.3 1894.67,1953.59 1897.63,1956.56 1897.63,1961.86 1918.06,1982.28 2044.65,1982.28 2116.14,2053.78 J1.2
D_P: J1.3 U6.15 | length 531.6
  Top Layer w15: U6.15 1937.94,1854.82 1944.11,1860.98 v1(1944.11,1934.61) 1943.34,1934.61 v1@1937,1940.94
  Bottom Layer w15: v1(1944.11,1934.61) 2032.33,1934.61 2037.72,1940 2038.66,1940.94 2046.53,1948.82 2141.73,2044.02 J1.3
DGND: C1.1 C2.1 C3.2 C4.1 C5.1 C6.1 C7.1 C11.1 C12.1 C18.1 C19.1 C23.1 D2.1 D6.2 J1.5 M1.2 M2.2 N1.2 P1.3 P1.4 P3.3 P3.5 pad.3 pad.4 POWER.2 R5.1 R7.1 R11.1 R15.1 R18.1 T1.2 U2.7 U2.8 U2.13 U2.14 U3.1 U4.2 U6.7 U6.18 U6.21 U6.25 U6.26 U7.40 U8.2 | length 588.7
  Top Layer w11.81: v1(2549.17,1637.33) 2559,1647.15 2678.81,1647.15 U7.40 ; P3.5 3004.73,2200.05 v1(3020.31,2200.05) 3031.53,2188.83 3031.53,2156.13 P3.3 ; C6.1 3153.4,2082.81 v1(3188.97,2047.24) ; U2.13 3494.88,1799.68 v1(3510.97,1815.77) ; U2.14 v1@3497.87,1819.37
  Bottom Layer w11.81: N1.2 v1(3694.02,1471.84)
  other v1: 2716.57,1175 4078,1348.15
DVCC_5V: C3.1 C4.2 C5.2 C6.2 C11.2 C18.2 C23.2 D5V.1 J1.1 P3.1 R1.2 R2.2 R8.2 R9.2 R10.2 R12.2 R13.1 R23.2 R24.2 U2.6 U2.9 U2.12 U3.2 U4.3 U6.4 U6.19 U6.20 U7.7 U7.41 U8.5 | length 9108.2
  Top Layer w11.81: U6.20 1807.62,1804.07 1833.21,1778.48 ; v1(1830.71,1752.95) 1838.58,1760.83 1838.58,1773.11 1833.21,1778.48 ; R23.2 R24.2 1812.01,1982.28 C18.2 1811.02,1937.99 1833.21,1915.8 U6.19 1833.21,1778.48 ; C5.2 2394.1,2044.2 2394.1,2029.03 2384.36,2019.29 2384.36,1997.29 U7.7 2450,1931.64 2450,1765.63 2520.33,1695.3 2658.5,1695.3 ; v1(2719.24,1773.11) 2658.5,1712.37 2658.5,1695.3 ; C23.2 2783.15,1570.65 U7.41 2658.5,1695.3 ; R9.2 2835.78,2288.3 2991.78,2288.3 3073.76,2206.32 3073.76,2127.66 P3.1 3083.29,2017.05 ; R8.2 3084.17,2016.18 ; C6.2 3085.05,2017.05 ; v1(3134.61,1989.4) 3110.94,1989.4 3084.17,2016.18 ; R1.2 3233.27,2123.4 3241.14,2115.52 3259.55,2115.52 v1(3274.72,2100.35) 3301.3,2126.92 R2.2 ; U2.6 3363.54,1760.31 ; C3.1 3363.54,1653.54 ; U2.9 3402.91,1720.94 3363.54,1760.31 ; U2.12 3383.23,1780 3363.54,1760.31 ; 3083.29,2017.05 3084.17,2016.18 ; 3083.29,2017.05 3085.05,2017.05 ; 3084.17,2016.18 3085.05,2017.05
  Top Layer w15.75: 1679.67,1145.17 U6.4
  Top Layer w19.68: 1679.67,1145.17 1712.87,1111.97 ; 2355,1111.97 R13.1 ; R12.2 2886.89,1219.41 v2(2862.48,1195) 2941.58,1115.9 3133.66,1115.9 3173.74,1155.98 R10.2 ; v1(3353.39,1528.76) 3353.39,1594.38 3363.54,1604.54 3363.54,1653.54 3363.54,1760.31
  Top Layer w31.5: 1811.02,1111.97 1811.02,1442.06 v1(1833.21,1464.25) ; v1(2746.47,1505.75) 2746.47,1524.16 C23.2
  Top Layer w62.99: 1712.87,1111.97 1811.02,1111.97 2355,1111.97 D5V.1 2779.45,1111.97 v2(2862.48,1195)
  Bottom Layer w11.81: 1830.71,1726.91 1897.62,1660 U4.3 C11.2@2037.47,1660 ; v1(1830.71,1752.95) 1830.71,1959.36 1875.25,2003.9 ; U8.5 1898.37,2086.61 1918.06,2066.93 1918.06,2046.71 1875.25,2003.9 ; J1.1 2090.55,2069.9 2024.55,2003.9 1875.25,2003.9 ; 2677.17,1265.55 2680,1268.39 C4.2 ; v1(2719.24,1773.11) 2800.95,1854.82 3083.45,1854.82 3134.61,1905.97 v1(3134.61,1989.4) 3134.61,2066.6 3168.35,2100.35 v1(3274.72,2100.35)
  Bottom Layer w19.68: 3329.61,1195 3329.61,1499.39 3353.39,1523.17 v1(3353.39,1528.76)
  Bottom Layer w31.5: v1(1830.71,1752.95) 1830.71,1726.91 1830.71,1466.76 v1(1833.21,1464.25) ; v1(2746.47,1505.75) 2755.91,1496.31 2755.91,1265.55
  Bottom Layer w62.99: U3.2 2677.17,1265.55 2755.91,1265.55 2791.93,1265.55 v2(2862.48,1195) 3329.61,1195
FTDI_GREEN: D4.2 U6.23 | length 204.5
  Top Layer w11.81: D4.2 1598.33,1966.61 1644.27,1920.67 1698.1,1920.67 1728.29,1890.47 1728.29,1855.01 U6.23
FTDI_RED: D5.2 U6.22 | length 134.7
  Top Layer w11.81: D5.2 1716.44,1966.61 1756.44,1926.61 U6.22
FTDI_UART_RX: R22.2 U7.23 | length 308.2
  Top Layer w11.81: R22.2 2141.61,1614.17 2180.95,1574.83 2305.71,1574.83 U7.23
FTDI_UART_TX: R21.2 U7.22 | length 416.5
  Top Layer w11.81: R21.2 2169.61,1771.65 2204.72,1736.54 2204.72,1617.22 2224.54,1597.4 2300.44,1597.4 U7.22
ISO_N: P2.3 U1.14 | length 639.4
  Top Layer w15: U1.14 3845,1462.03 3957.65,1574.68 4017.67,1574.68 4094.49,1651.5 4094.49,1708.54 4165.94,1780 4186.42,1780 P2.3
ISO_P: P2.4 U1.16 | length 524.4
  Top Layer w15: U1.16 3945,1438.27 3917.32,1465.94 3917.32,1499 3968.01,1549.68 4028.03,1549.68 4119.49,1641.14 4119.49,1652.24 4167.72,1700.47 P2.4
JTAG_RST: C17.2 P3.10 R9.1 U7.63 | length 1020
  Top Layer w11.81: C17.2 2144.24,1692.91 v1(2165.35,1714.02) ; v1(2500,1791.34) 2500,1908.31 U7.63 2654.68,2062.99 2726.25,2062.99 P3.10 2731.16,2152.04 2731.16,2183.68 R9.1
  Bottom Layer w11.81: v1(2165.35,1714.02) 2231.33,1780 2488.66,1780 v1(2500,1791.34)
JTAG_TCLK: P3.4 U7.62 | length 416.5
  Top Layer w11.81: v1(2639.78,1907.48) 2611.09,1936.17 2611.09,1991.56 U7.62 ; v1(2816.31,1940) 2816.31,1940.92 P3.4
  Bottom Layer w11.81: v1(2639.78,1907.48) 2783.27,1907.48 2815.79,1940 v1(2816.31,1940)
JTAG_TDI: P3.8 U7.61 | length 183.2
  Top Layer w11.81: U7.61 2681.81,2034.45 2768.42,2034.45 P3.8
JTAG_TDO: P3.6 U7.58 | length 179.4
  Top Layer w11.81: U7.58 2726.75,1995.88 2800.56,1995.88 P3.6
JTAG_TMS: P3.2 R8.1 U7.64 | length 623.8
  Top Layer w11.81: U7.64 v1(2670.15,2106.3) ; R8.1 2997.13,1929.13 v1(2954.07,1929.13) ; v1(2954.07,1929.13) P3.2 v1(2954.07,1929.13)
  Bottom Layer w11.81: v1(2670.15,2106.3) 2753.43,2106.3 2930.59,1929.13 v1(2954.07,1929.13)
led1: M1.1 R15.2 U7.46 | length 616.2
  Top Layer w11.81: U7.46 2848.57,1644.43 v1(2881.8,1644.43) ; v1(3093.27,1644.43) 3045.8,1596.96 M1.1 3072.64,1449.37 3082.01,1440 R15.2
  Bottom Layer w11.81: v1(2881.8,1644.43) v1(3093.27,1644.43)
led2: M2.1 R11.2 U7.47 | length 753.6
  Top Layer w11.81: U7.47 U7.47@2821.42,1699.41 ; U7.47@2821.43,1699.41 2844.14,1676.7 2877.9,1676.7 2897.59,1696.38 v1(2911.67,1696.38) ; v1(3168.35,1672.38) 3168.35,1600.86 3283.27,1485.94 M2.1 R11.2
  Bottom Layer w11.81: v1(2911.67,1696.38) 2931.35,1676.7 3164.03,1676.7 v1(3168.35,1672.38)
MSTR_EN: U2.1 U7.49 | length 462
  Top Layer w11.81: U7.49 2840.17,1858.74 U2.1
NetC1_2: C1.2 U1.15 | length 172.3
  Top Layer w19.68: C1.2 3862.44,1268.43 3895,1300.99 U1.15
NetC2_2: C2.2 U1.2 | length 357.5
  Top Layer w11.81: U1.2 3895,1672.38 3927.74,1639.65 3984.57,1639.65 4015.75,1670.83 C2.2
NetC17_1: C17.1 U6.2 | length 516.8
  Top Layer w11.81: U6.2 1628.49,1623.51 1677.25,1672.27 1995.14,1672.27 2015.79,1692.91 C17.1
NetD1_1: D1.1 R5.2 T1.1 | length 403.2
  Bottom Layer w19.68: T1.1 1752.6,1305.53 1756.44,1309.37 1756.44,1344.08 R5.2 1758.5,1382.32 1770,1393.82 1928.07,1393.82 1967.76,1354.13 D1.1
NetD4_1: D4.1 R23.1 | length 451.9
  Top Layer w11.81: D4.1 1594.39,2082.56 1622.48,2110.64 1906.29,2110.64 1968.5,2048.42 R23.1
NetD5_1: D5.1 R24.1 | length 234.9
  Top Layer w11.81: D5.1 1741.95,2086.61 1876.52,2086.61 1889.76,2073.37 R24.1
NetD6_1: D6.1 R13.2 | length 131
  Top Layer w19.68: R13.2 2440.26,1266.18 2450,1256.44 D6.1
NetD7_1: D7.1 R14.2 | length 103.5
  Top Layer w19.68: R14.2 3840.67,1132.56 3861.26,1111.97 D7.1
NetD8_1: D8.1 R10.1 | length 150.3
  Top Layer w11.81: R10.1 3207.92,1259.33 3228.35,1238.9 3228.35,1210.26 3241.98,1196.64 D8.1
NetD8_2: D8.2 M2.3 | length 108.4
  Top Layer w11.81: M2.3 3270.83,1366.26 3281.3,1355.79 D8.2
NetD9_1: D9.1 R12.1 | length 160.3
  Top Layer w11.81: R12.1 2979.43,1270.59 3004.73,1245.29 3004.73,1200.3 3008.39,1196.64 D9.1
NetD9_2: D9.2 M1.3 | length 119.9
  Top Layer w11.81: M1.3 3035.93,1370.63 3057.39,1349.17 D9.2
NetISON_1: ISON.1 R3.1 U1.3 U2.10 | length 830.7
  Top Layer w11.81: U2.10 3517.32,1740.63 3609.84,1833.15 R3.1 v1(3785.95,1833.15) 3845,1774.1 U1.3 ; ISON.1 3660.75,2024.86 v1(3756.47,1929.13)
  Bottom Layer w11.81: v1(3756.47,1929.13) 3785.95,1899.66 v1(3785.95,1833.15)
NetISOP_1: ISOP.1 R3.2 U1.1 U2.11 | length 883.4
  Top Layer w11.81: U2.11 3503.16,1760.31 3558.62,1815.77 3558.62,1846.02 3596.93,1884.33 R3.2 3844.02,1884.33 ; ISOP.1 3844.02,2103.21 3844.02,1884.33 ; U1.1 3945,1783.35 3844.02,1884.33
NetP1_7: P1.7 U8.6 | length 532.3
  Bottom Layer w11.81: P1.7 1723.43,1937.99 U8.6
NetP1_8: P1.8 U8.4 | length 656.9
  Bottom Layer w11.81: P1.8 1494.01,2185.04 1694.38,2185.04 1741.73,2232.39 1816.32,2232.39 1846.46,2202.25 U8.4
NetP2_1: P2.1 R19.2 | length 169.6
  Top Layer w15: R19.2 P2.1
NetP2_2: P2.2 R20.2 | length 244.6
  Top Layer w11.81: R20.2 4088.5,1968.5 4120.31,1936.69 P2.2
NetPOWER_1: POWER.1 R4.1 | length 168.9
  Top Layer w19.68: POWER.1 2065.12,1204.09 v1(2106.02,1245)
  Bottom Layer w19.68: R4.1 2105.39,1244.37 v1(2106.02,1245)
NetR6_1: R6.1 U2.16 | length 119.6
  Top Layer w11.81: U2.16 3484.25,1858.74 3493.84,1868.32 R6.1
NetR6_2: R6.2 R7.2 U2.15 | length 239.7
  Top Layer w11.81: U2.15 3493.33,1839.05 3498.98,1844.71 3500.4,1844.71 3545.02,1889.32 R6.2 R7.2@3545.02,2013.15
NetR21_1: R21.1 U6.1 | length 586.3
  Top Layer w11.81: U6.1 1602.9,1641.05 1654.77,1692.92 1940.99,1692.92 2019.73,1771.65 R21.1
NetR22_1: R22.1 U6.5 | length 432.7
  Top Layer w11.81: U6.5 1705.26,1625.97 1721.02,1641.73 1968.98,1641.73 1996.54,1614.17 R22.1
SPIO.MISO: MI.1 R2.1 U2.3 U7.31 | length 1659.2
  Top Layer w11.81: U7.31 2501.28,1547.69 2509.49,1555.9 2547.35,1555.9 2646.72,1456.54 2804.62,1456.54 3167.45,1819.37 3254.05,1819.37 U2.3 3315.16,1819.37 3353.39,1857.6 3353.39,2196.85 3336.73,2196.85 ; R2.1 3302.21,2196.85 3336.73,2196.85 ; MI.1 3336.73,2196.85
SPIO.MOSI: MO.1 R1.1 U2.2 U7.33 | length 1524.5
  Top Layer w11.81: U7.33 2654.87,1476.22 2792.6,1476.22 3155.43,1839.06 3282.88,1839.06 3295.39,1839.05 3307.01,1839.06 3331.47,1863.52 3331.47,1951.88 3186.81,2096.53 3186.81,2196.85 ; MO.1 3186.81,2196.85 ; R1.1 3186.81,2196.85
SPIO.SCK: SCK.1 U2.4 U7.32 | length 1667.4
  Top Layer w11.81: U7.32 2515.2,1533.77 2612.12,1436.85 2813.27,1436.85 3176.1,1799.68 U2.4 3295.39,1799.68 3323.31,1799.68 3382.01,1858.38 3382.01,2263.58 3482.6,2364.17 SCK.1
SPLIT: C12.2 R16.2 R17.1 U4.5 | length 523.8
  Top Layer w11.81: v1(1554.39,1623.03) v1(1554.39,1780)
  Bottom Layer w11.81: v1(1554.39,1623.03) 1573.01,1604.41 R16.2 1685.49,1604.41 1691.08,1610 U4.5 1735.9,1597.4 1713.15,1574.64 C12.2 ; v1(1554.39,1780) 1554.98,1780.59 R17.1
STBY: R18.2 U4.8 | length 76.6
  Bottom Layer w11.81: U4.8 1739.8,1763.9 R18.2
VCC_3V3: C19.2 U6.17 | length 259.7
  Top Layer w11.81: U6.17 1884.39,1804.88 1905.65,1783.62 1966.61,1783.62 2033.38,1850.39 C19.2
pads on no net: J1.4 J1.6 J1.7 J1.8 J1.9 J1.10 J1.11 P1.9 P1.10 P2.9 P2.10 P3.7 P3.9 P3.MH1 P3.MH2 U1.4 U1.5 U1.6 U1.7 U1.8 U1.9 U1.10 U1.11 U1.12 U1.13 U3.THM U5.THM U6.3 U6.6 U6.8 U6.9 U6.10 U6.11 U6.12 U6.13 U6.14 U6.24 U6.27 U6.28 U7.3 U7.4 U7.5 U7.6 U7.11 U7.12 U7.13 U7.14 U7.15 U7.16 U7.17 U7.18 U7.19 U7.24 U7.25 U7.26 U7.27 U7.28 U7.29 U7.30 U7.34 U7.35 U7.36 U7.37 U7.38 U7.39 U7.42 U7.43 U7.44 U7.45 U7.52 U7.53 U7.54 U7.55 U7.56 U7.57 U7.59 U7.60

## Polygon pours and split planes (outlines as drawn)
DGND on Bottom Layer "Bottom Layer-DGND" (solid, pour order 4): 984.25,826.77 984.25,2460.63 4724.41,2460.63 4724.41,826.77
DGND on Top Layer "Top Layer-DGND" (solid, pour order 6): 994.21,826.77 994.21,2460.63 4734.36,2460.63 4734.36,826.77

## Other copper
Top Layer:
  pour cut-out: 2796.06,2165.31 2826.46,2195.71 3000.4,2021.77 2970.39,1991.76
Bottom Layer:
  pour cut-out: 2796.06,2165.31 2826.46,2195.71 3000.4,2021.77 2970.39,1991.76

## Silkscreen, mask and mechanical layers (free items; w line width, h text height)
Top Overlay:
  text "BMS Master R2" at 1790,905.51 h60
  text "ok..." at 3072.64,885.83 h60 r90
  text "stat." at 3294.29,885.83 h60 r90
Bottom Overlay:
  text "Alvin Ha / Karina Aplaon" at 4004.25,1714.02 h60
  text "c" at 3104.25,1456.88 h984.25
  text "r" at 4020,885.83 h984.25

## Text inside footprints (layer, text, board x,y; h text height)
D4: Top Overlay "*" at 1614.39,1951.89 h60 r270
D5: Top Overlay "*" at 1732.5,1951.89 h60 r270
D6: Top Overlay "*" at 2430,1329.72 h60 r90
D7: Top Overlay "*" at 3880,1217.24 h60 r90
D8: Top Overlay "*" at 3261.3,1301.91 h60 r90
D9: Top Overlay "*" at 3037.39,1301.91 h60 r90
POWER: Top Overlay "*" at 1985.16,1309.37 h60 r90